# Altium PCB 电源板.PcbDoc
Units mil, origin at the board's own origin, x right, y up, seen from the top; angles counter-clockwise.
Board outline 1185 x 1495 mil, 2 copper layers (Top Layer, Bottom Layer); 12 components, 3 nets, 25 pads, 0 vias.
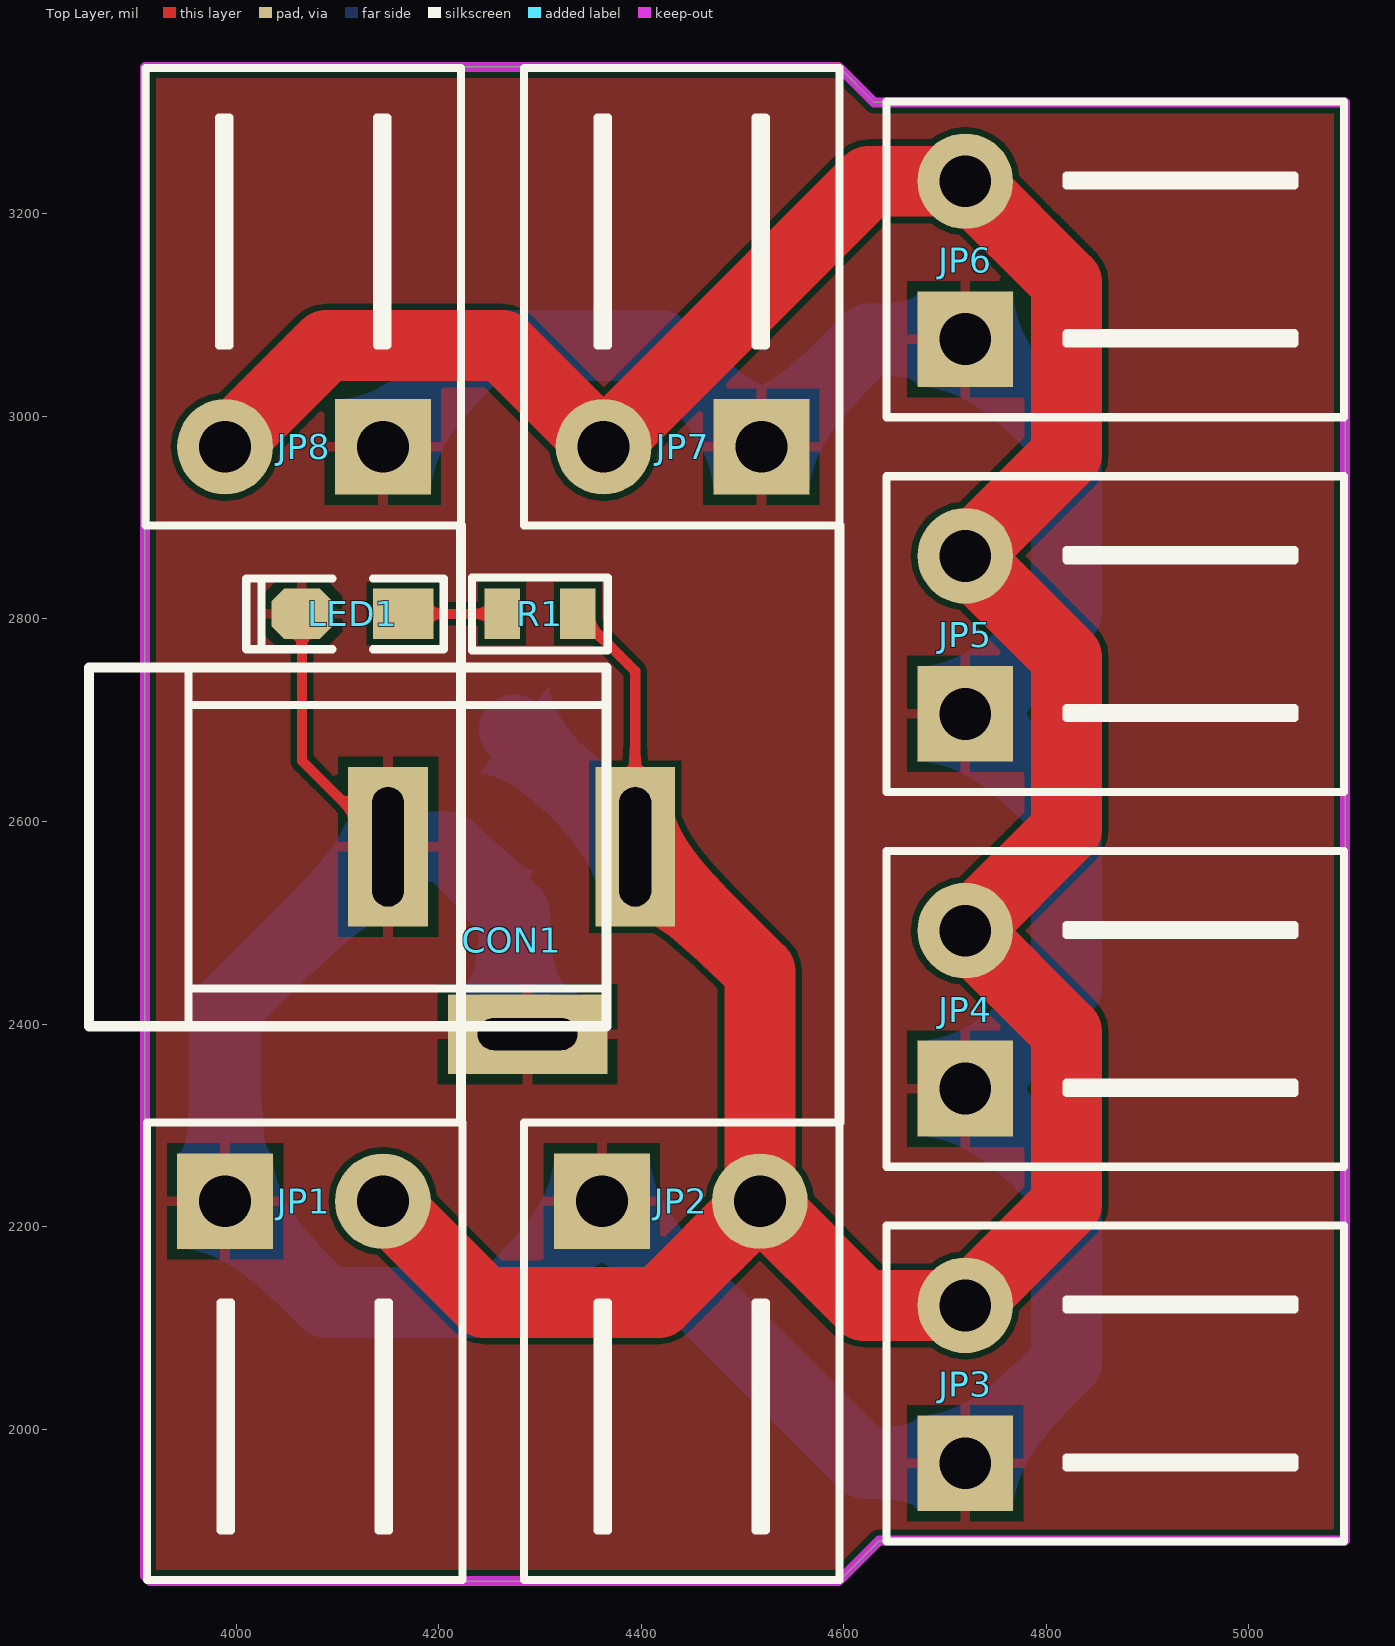
[diagram p0: Top Layer view]
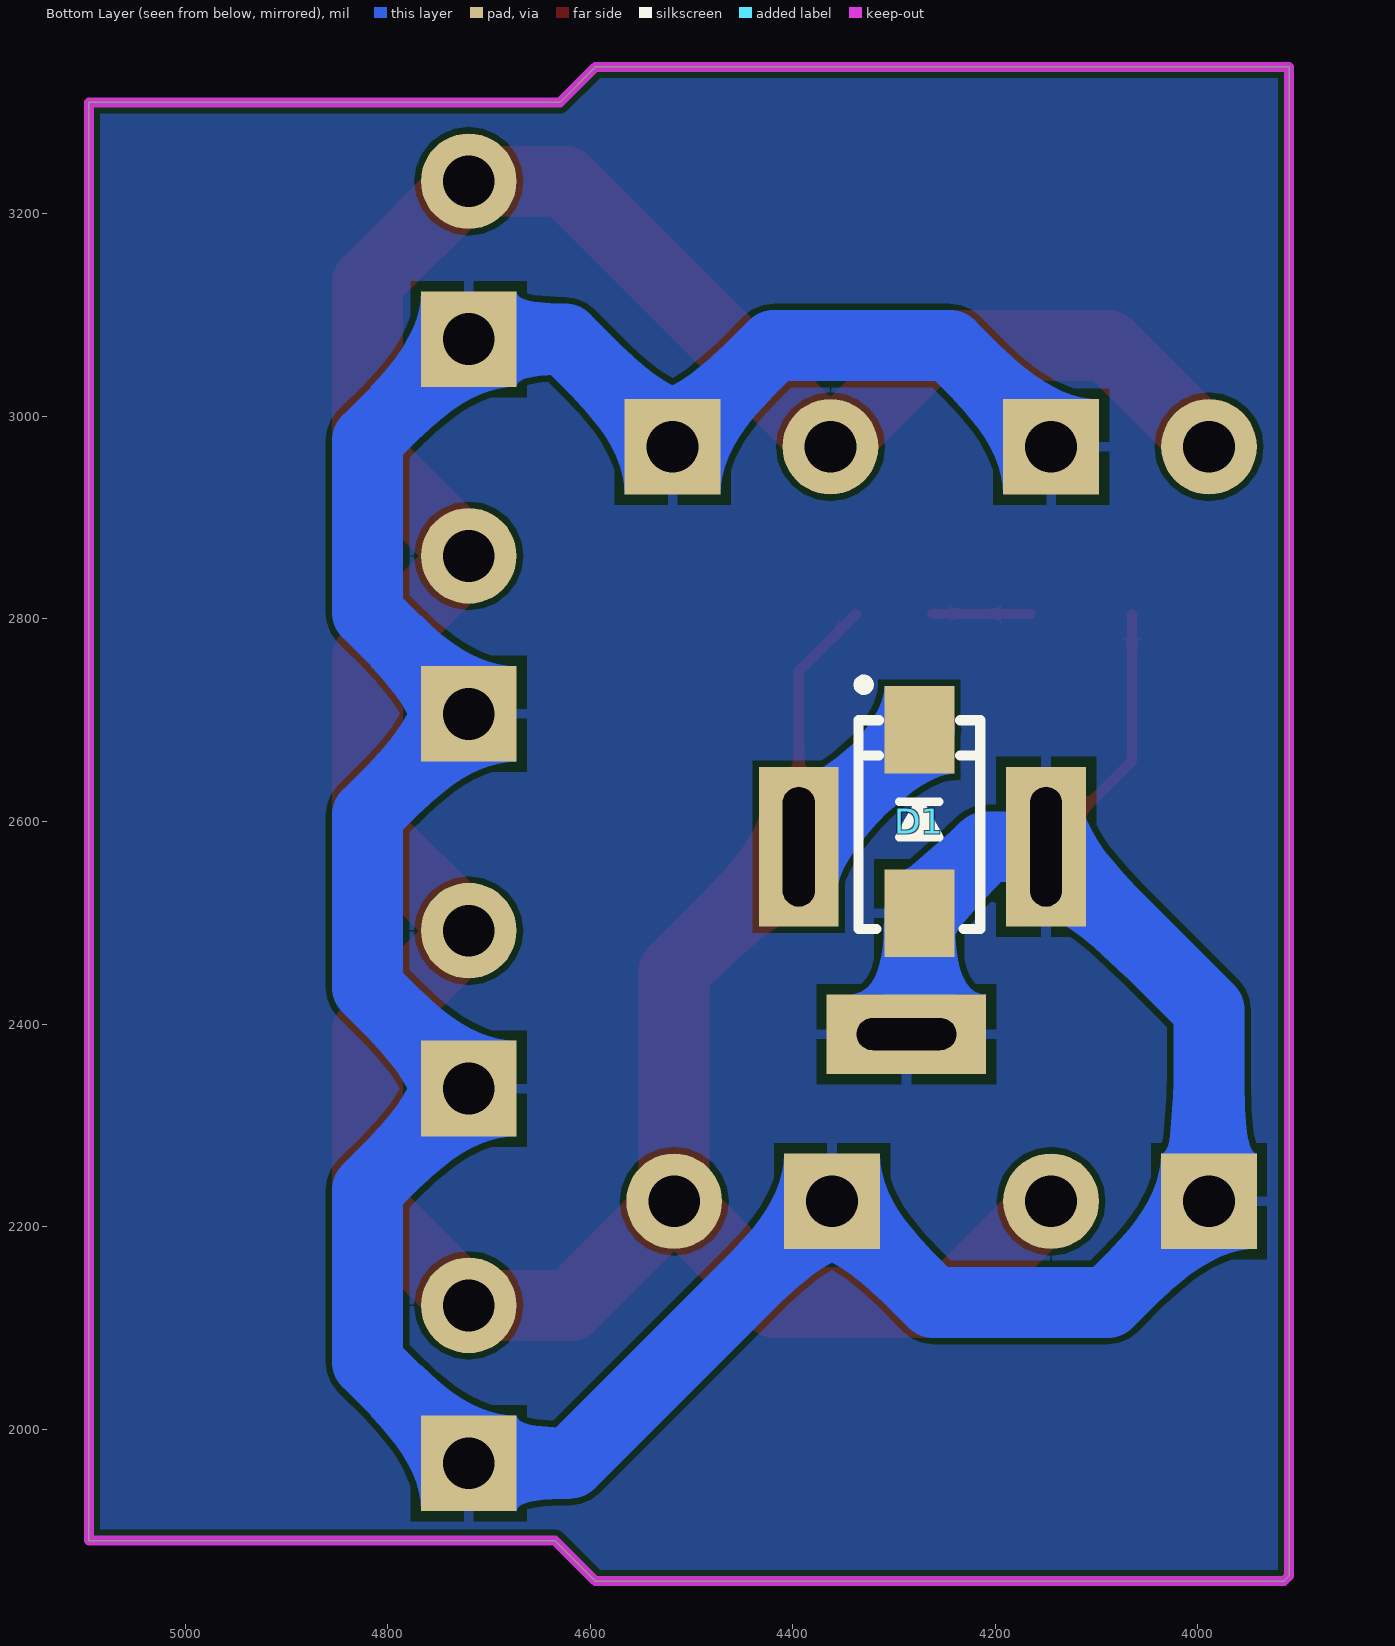
[diagram p1: Bottom Layer view, seen from below]
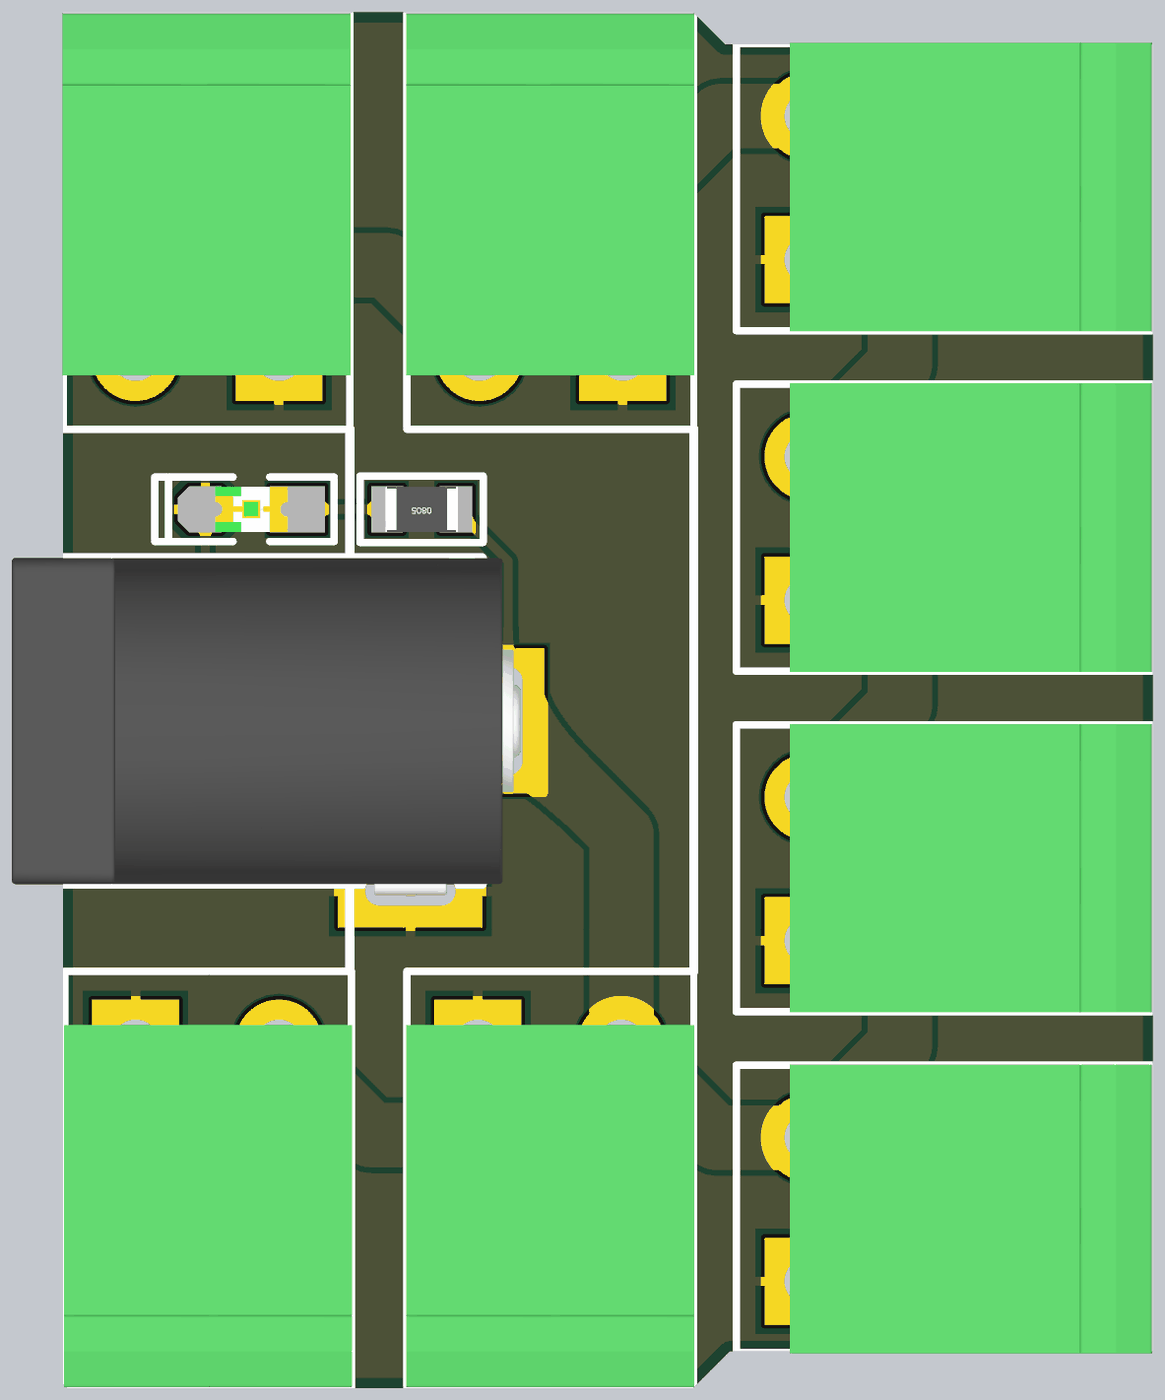
[diagram p2: 3D render of the assembled board from above, using the file's embedded part models]

## Layer stack, top to bottom
Top Solder: solder mask 0.4, Solder Resist, Dk 3.5
Top Layer: signal copper 1.4
Dielectric 1: dielectric 12.6, FR-4, Dk 4.8
Bottom Layer: signal copper 1.4
Bottom Solder: solder mask 0.4, Solder Resist, Dk 3.5

## Board outline
3910,1855 3915,1850 4595,1850 4635,1890 5095,1890 5095,3310 4630,3310 4595,3345 3910,3345

## Design rules (kind name [scope] priority, off if disabled: settings)
Clearance [All] p1: gap=6 ignorepadtopadclearanceinfootprint=FALSE
PolygonConnect [All] p1: connectstyle=Relief reliefconductorwidth=10 reliefentries=4 polygonreliefangle="90 Angle" airgapwidth=10
RoutingVias [All] p1: holewidth=28 width=50 viastyle="Through Hole" minholewidth=28 minwidth=50 maxholewidth=28 maxwidth=50
SolderMaskExpansion [All] p1: expansion=4
Width [All] p1: maxlimit=100 minlimit=10 preferedwidth=10
30 further rules are at their usual default settings.

## Components (designator, comment, footprint, x,y, rotation, side; value= is the part's Value field where it differs from the comment)
CON1 "3.5*1.3" DC-005 4150,2575 r180 top
D1 "SS34" SMA 4275,2600 r90 bottom
JP1 "HDR-1X2" HT3.96-WI-2P 4067.83,2225 r0 top
JP2 "HDR-1X2" HT3.96-WI-2P 4440,2225 r0 top
JP3 "HDR-1X2" HT3.96-WI-2P 4720,2045 r90 top
JP4 "HDR-1X2" HT3.96-WI-2P 4720,2415 r90 top
JP5 "HDR-1X2" HT3.96-WI-2P 4720,2785 r90 top
JP6 "HDR-1X2" HT3.96-WI-2P 4720,3155 r90 top
JP7 "HDR-1X2" HT3.96-WI-2P 4440,2970 r180 top
JP8 "HDR-1X2" HT3.96-WI-2P 4066.26,2970 r180 top
LED1 "红色" "LED 0805R" 4115,2805 r180 top
R1 "10K" "R 0805_L" 4300,2805 r180 top

## Footprints (in the part's own frame and the unit in brackets; to place one, negate y for a bottom-side part, rotate by r counter-clockwise, add the part's x,y. Pads: shape width x height; smd on the part's side, far side on the other; paste and mask are expansions set on the pad)
DC-005 [mm] "5.5*2.1mm，DC30V,2.5A      淘宝ID:黄晶宝石"
  rect 2x4 hole 0.8 slot 3 at 90 deg: 1(-6.2,0) 2(0,0)
  rect 4x2 hole 0.8 slot 2.5 at 0 deg: 3(-3.5,4.7)
  silkscreen extent -5.48,-4.5 7.5,4.5, body extent -6.55,-4.5 7.5,4.8, height 11.2
HT3.96-WI-2P [mm] "HT3.96卧插端子"
  rect 2.4x2.4 hole 1.3: 1(-2,0)
  round 2.4 hole 1.3: 2(1.96,0)
  silkscreen extent -3.96,-9.5 3.96,1.98, body extent -3.98,-9.5 3.98,0.5, height 7.45
"LED 0805R" [mil] "红色0805LED"
  rect 60x50 smd: 1(-50,0)
  oct 60x50 smd: 2(50,0)
  silkscreen extent -90,-35 105,35, body extent -39,-25 39,25, height 32
"R 0805_L" [mil] "1/8W贴片电阻"
  rect 35x50 smd: 1(-37.4,0) 2(37.4,0)
  silkscreen extent -67,-36 67,36, body extent -39,-25 39,25, height 20
SMA [mm] "4.5x2.6*2.2mm（长宽高，不包括引脚）"
  rect 2.2x1.75 smd: 1(-2.3,0) 2(2.3,0)
  silkscreen extent -2.7,-1.52 3.56,1.52, body extent -2.52,-1.3 2.57,1.3, height 2.15

## Part data
CON1: library part P-DC, "低压电源接口"
D1: library part SS54, "肖特基二极管"
JP1 JP2 JP3 JP4 JP5 JP6 JP7 JP8: library part "Header 2", "2P接插件"
LED1: library part LED-SMD, "贴片LED", BOM名称=贴片LED, 学习资源=https://shop463601444.taobao.com, 版权归属="封装库来自淘宝 ID：黄晶宝石"
R1: library part R, "贴片电阻"

## Nets (pads, with @x,y where several pads share a name; then routed paths per layer and width w, separated by ;. In a path a pad name is that pad's centre, name@x,y a point inside that pad or via, vN(x,y) a via of type N, cw(c..) or ccw(c..) an arc to the next point about the centre after c; other vN are vias at no path point)
5V: CON1.1 D1.2 JP1.2 JP2.2 JP3.2 JP4.2 JP5.2 JP6.2 JP7.2 JP8.2 R1.1 | length 3802.7
  Top Layer w10: R1.1 4394.09,2748.31 CON1.1
  Top Layer w70: JP8.2 4089.09,3070 4262.83,3070 JP7.2 4625,3232.17 JP6.2 4820,3132.17 4820,2962.17 JP5.2 4820,2762.17 4820,2592.17 JP4.2 4820,2392.17 4820,2222.17 JP3.2 4620,2122.17 JP2.2 ; JP1.2 4245,2125 4417.17,2125 JP2.2 ; CON1.1 4517.17,2451.93 JP2.2
  Bottom Layer w70: D1.2 4390.55,2575 CON1.1
GND: CON1.2 CON1.3 D1.1 JP1.1 JP2.1 JP3.1 JP4.1 JP5.1 JP6.1 JP7.1 JP8.1 LED1.2 | length 3940.1
  Top Layer w10: LED1.2 4065,2660 CON1.2
  Bottom Layer w70: JP8.1 4245,3070 4418.74,3070 JP7.1 4625,3076.26 JP6.1 4820,2976.26 4820,2806.26 JP5.1 4820,2606.26 4820,2436.26 JP4.1 4820,2236.26 4820,2066.26 JP3.1 4620,1966.26 JP2.1 4261.26,2125 4089.09,2125 JP1.1 3989.09,2414.09 CON1.2 4209.45,2575 D1.1 4275,2402.76 CON1.3
NetLED1_1: LED1.1 R1.2 | length 97.6
  Top Layer w10: LED1.1 R1.2

## Polygon pours and split planes (outlines as drawn)
GND on Top Layer (solid, remove dead copper, pour order 2): 3715,3445 3755,3405 5355,3405 5355,1875 5160,1680 5140,1700 3650,1700
GND on Top Layer (solid, pour order 0): 3790,3460
GND on Bottom Layer (solid, remove dead copper, pour order 4): 3715,3440 5225,3440 5335,3330 5335,1830 5185,1680 5125,1740 3630,1740

## Keep-outs
Keep-Out Layer:
  the board outline again, w10

## Silkscreen, mask and mechanical layers (free items; w line width, h text height)
Top Overlay:
  lines w10: 4222.17,2302.95 4222.17,2892.05 ; 4595.91,2302.95 4595.91,2892.05